# EAGLE board demeter_v25 (EAGLE 6.2)
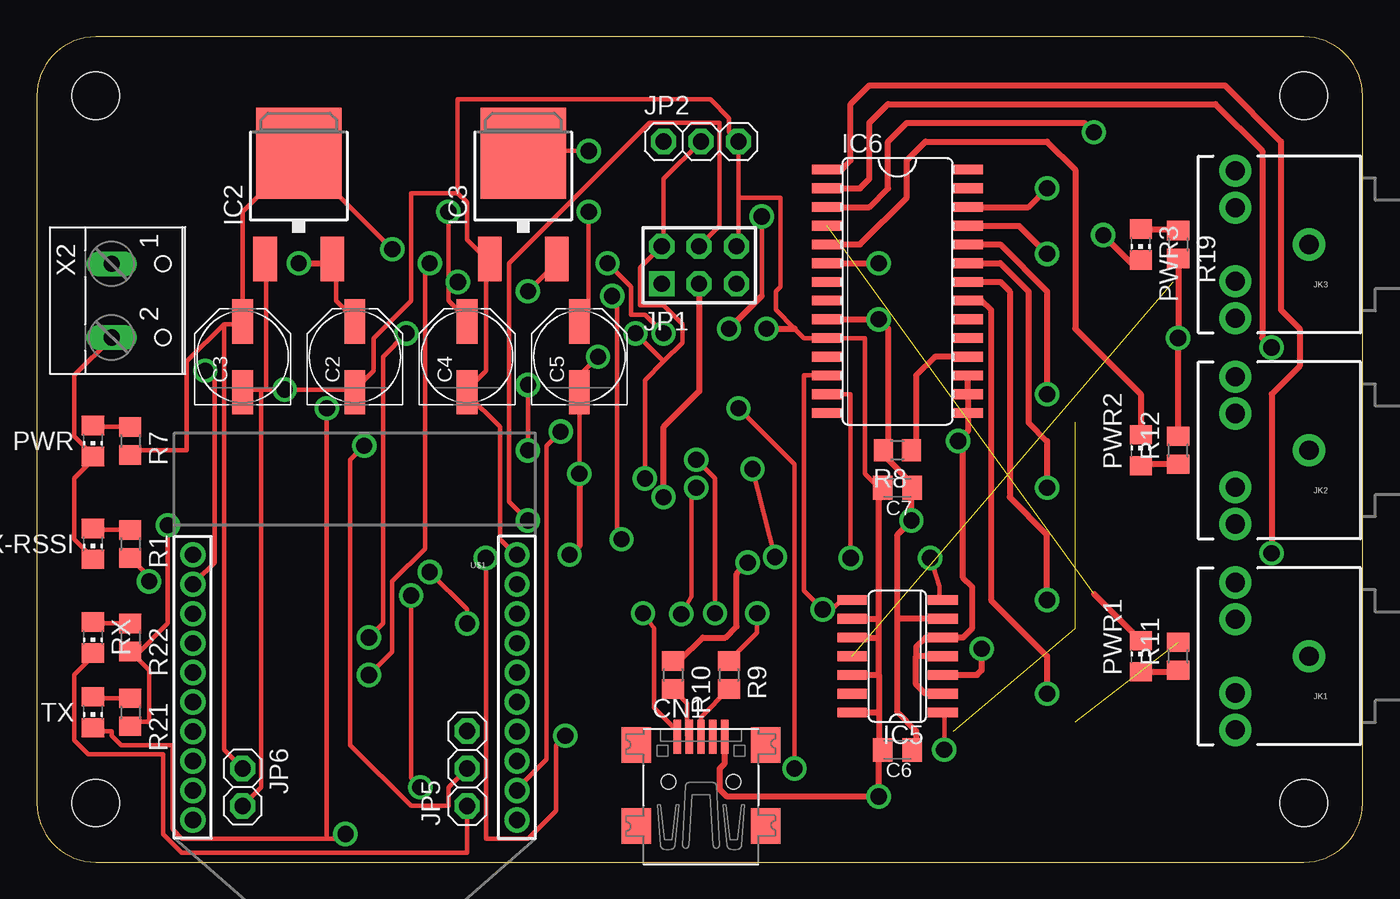
[diagram p0: board, top side]
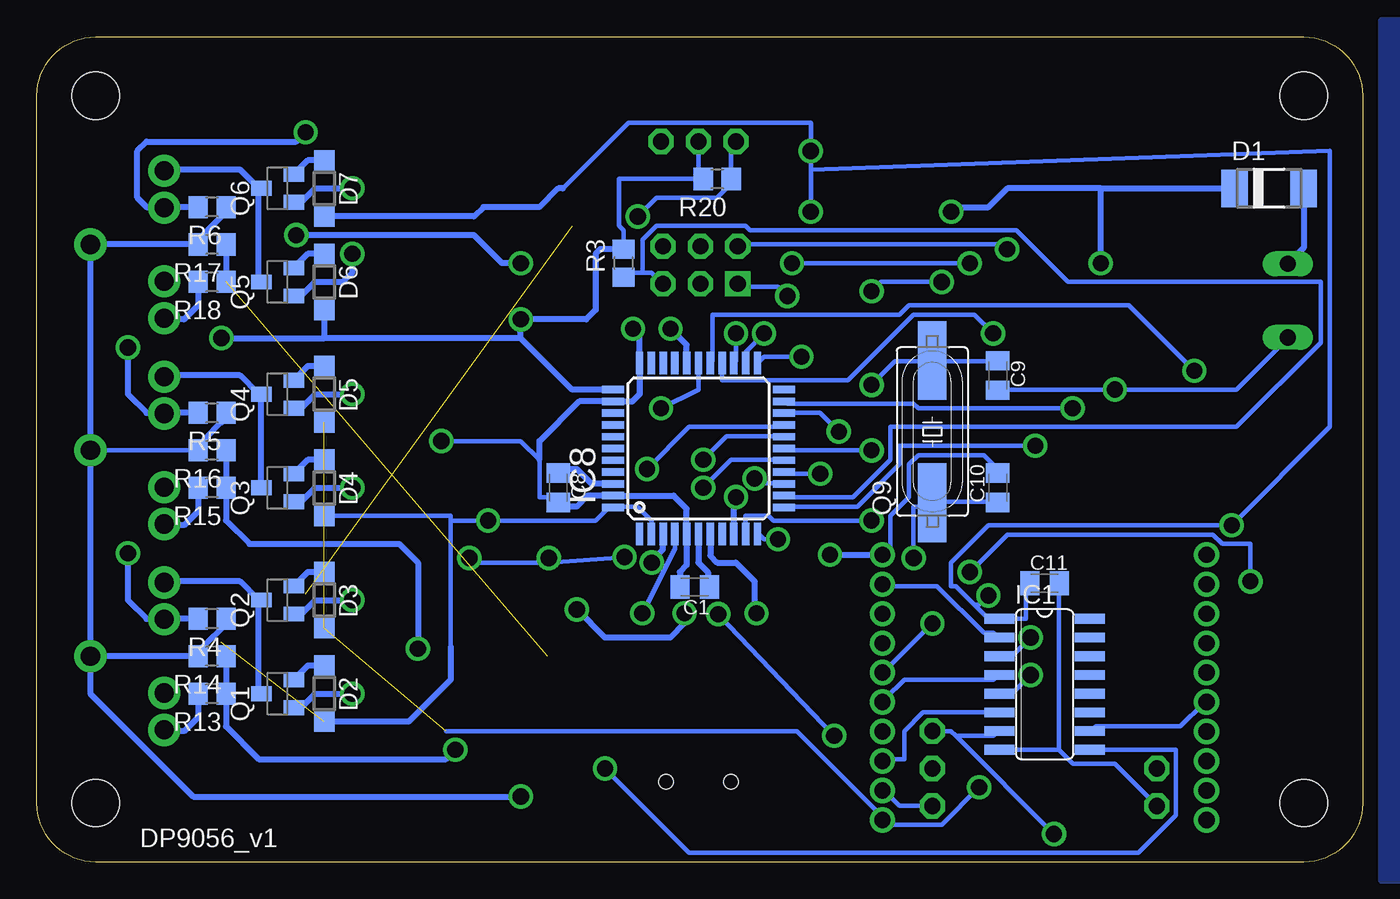
[diagram p1: board, bottom side, seen from below]

Size 90 x 56 mm. Coordinates in mm from the lower left corner, seen from the top.
Copper layers (1*16): Top 0.035mm / dielectric 1.5mm / Bottom 0.035mm
Design rules: minimum track width 12mil, minimum drill 1.1mm, track to track 8mil, track to pad 8mil, pad to pad 8mil, via to via 8mil, smd to smd 8mil, copper to edge 10mil, drill to drill 8mil, minimum pad ring 12mil, minimum via ring 10mil, stop-mask expansion 4mil, vias tented up to drill 25mil, thermal gap 10mil

## Footprints (pad centres in the part's own frame; a part is rotated, then mirrored left to right if it is on the bottom)
C0805K = smd 1.3 x 1.6: 1 -1,0; 2 1,0
PANASONIC_D = smd 3 x 1.4: + 2.4,0; - -2.4,0
USB-MINIB = smd 0.5 x 2.308: D+ 0,4.064; D- -0.8,4.064; GND 1.6,4.064; ID 0.8,4.064; VBUS -1.6,4.064 | smd 2 x 2.4: GND1 -4.4,-2; GND2 -4.4,3.5; GND3 4.4,3.5; GND4 4.4,-2 | hole 1: -2.2,1; 2.2,1
DO-214AC = smd 1.778 x 2.54: A 2.342,0; C -2.342,0
SOD123 = smd 1.4 x 1.4: A 1.9,0; C -1.9,0
SO16 = smd 0.66 x 2.032: 1 -4.445,-3.073; 2 -3.175,-3.073; 3 -1.905,-3.073; 4 -0.635,-3.073; 5 0.635,-3.073; 6 1.905,-3.073; 7 3.175,-3.073; 8 4.445,-3.073; 9 4.445,3.073; 10 3.175,3.073; 11 1.905,3.073; 12 0.635,3.073; 13 -0.635,3.073; 14 -1.905,3.073; 15 -3.175,3.073; 16 -4.445,3.073
DPACK = smd 1.6 x 3: 1 -2.28,-4.8; 3 2.28,-4.8 | smd 5.8 x 6.2: 4 0,2.38
SO14 = smd 2.032 x 0.66: 1 -3.073,3.81; 2 -3.073,2.54; 3 -3.073,1.27; 4 -3.073,0; 5 -3.073,-1.27; 6 -3.073,-2.54; 7 -3.073,-3.81; 8 3.073,-3.81; 9 3.073,-2.54; 10 3.073,-1.27; 11 3.073,0; 12 3.073,1.27; 13 3.073,2.54; 14 3.073,3.81
SO28W = smd 0.66 x 2.032: 1 -7.62,-4.78; 2 -6.35,-4.78; 3 -5.08,-4.78; 4 -3.81,-4.78; 5 -2.54,-4.78; 6 -1.27,-4.78; 7 0,-4.78; 8 1.27,-4.78; 9 2.54,-4.78; 10 3.81,-4.78; 11 5.08,-4.78; 12 6.35,-4.78; 13 7.62,-4.78; 14 8.89,-4.78; 15 8.89,4.78; 16 7.62,4.78; 17 6.35,4.78; 18 5.08,4.78; 19 3.81,4.78; 20 2.54,4.78; 21 1.27,4.78; 22 0,4.78; 23 -1.27,4.78; 24 -2.54,4.78; 25 -3.81,4.78; 26 -5.08,4.78; 27 -6.35,4.78; 28 -7.62,4.78
TQFP44 = smd 1.5 x 0.5: 1 -5.8,4; 2 -5.8,3.2; 3 -5.8,2.4; 4 -5.8,1.6; 5 -5.8,0.8; 6 -5.8,0; 7 -5.8,-0.8; 8 -5.8,-1.6; 9 -5.8,-2.4; 10 -5.8,-3.2; 11 -5.8,-4; 23 5.8,-4; 24 5.8,-3.2; 25 5.8,-2.4; 26 5.8,-1.6; 27 5.8,-0.8; 28 5.8,0; 29 5.8,0.8; 30 5.8,1.6; 31 5.8,2.4; 32 5.8,3.2; 33 5.8,4 | smd 0.5 x 1.5: 12 -4,-5.8; 13 -3.2,-5.8; 14 -2.4,-5.8; 15 -1.6,-5.8; 16 -0.8,-5.8; 17 0,-5.8; 18 0.8,-5.8; 19 1.6,-5.8; 20 2.4,-5.8; 21 3.2,-5.8; 22 4,-5.8; 34 4,5.8; 35 3.2,5.8; 36 2.4,5.8; 37 1.6,5.8; 38 0.8,5.8; 39 0,5.8; 40 -0.8,5.8; 41 -1.6,5.8; 42 -2.4,5.8; 43 -3.2,5.8; 44 -4,5.8
AUDIO-JACK = drill 1.3 pad 2.184: RING 5,5; RSH 5,2.5; SLEEVE 0,0; TIP 5,-5; TSH 5,-2.5
AVR-ISP-6 = drill 1.1 square: 1 -2.54,-1.27 | drill 1.1 octagon: 2 -2.54,1.27; 3 0,-1.27; 4 0,1.27; 5 2.54,-1.27; 6 2.54,1.27
1X03 = drill 1.1 octagon: 1 -2.54,0; 2 0,0; 3 2.54,0
1X02 = drill 1.1 octagon: 1 -1.27,0; 2 1.27,0
CHIP-LED0805 = smd 1.5 x 1.3: A 0,-1.05; C 0,1.05
SOT23 = smd 1 x 1.4: 1 -0.95,-1.1; 2 0.95,-1.1; 3 0,1.1
HC49UP = smd 5.334 x 1.93: 1 -4.826,0; 2 4.826,0
R0805 = smd 1.3 x 1.5: 1 -0.95,0; 2 0.95,0
XBEE-1 = drill 1.1: 1 -11,20; 2 -11,18; 3 -11,16; 4 -11,14; 5 -11,12; 6 -11,10; 7 -11,8; 8 -11,6; 9 -11,4; 10 -11,2; 11 11,2; 12 11,4; 13 11,6; 14 11,8; 15 11,10; 16 11,12; 17 11,14; 18 11,16; 19 11,18; 20 11,20
DP9056_V1 = hole 3.2: 4,4; 86,4; 86,52; 4,52
W237-102 = drill 1.1 long: 1 -2.5,-1.27; 2 2.5,-1.27

## Placement (x,y rotation side)
C1  1uF  [C0805K]  45.34,18.67 180 bottom
C2  22uF  [PANASONIC_D]  21.59,34.29 90 top
C3  100uF  [PANASONIC_D]  13.97,34.29 90 top
C4  22uF  [PANASONIC_D]  29.21,34.29 90 top
C5  100uF  [PANASONIC_D]  36.83,34.29 90 top
C6  100nF  [C0805K]  58.42,7.62 180 top
C7  100nF  [C0805K]  58.42,25.4 180 top
C8  100nF  [C0805K]  54.61,25.4 270 bottom
C9  22pF  [C0805K]  24.77,33.02 270 bottom
C10  22pF  [C0805K]  24.77,25.4 90 bottom
C11  100nF  [C0805K]  21.59,18.92 0 bottom
CN1  [USB-MINIB]  45.08,4.45 0 top
D1  S1M  [DO-214AC]  6.35,45.72 0 bottom
D2  [SOD123]  70.48,11.43 270 bottom
D3  [SOD123]  70.48,17.78 270 bottom
D4  [SOD123]  70.48,25.4 270 bottom
D5  [SOD123]  70.48,31.75 270 bottom
D6  [SOD123]  70.48,39.37 270 bottom
D7  [SOD123]  70.48,45.72 270 bottom
IC1  4050  [SO16]  21.59,12.07 270 bottom
IC2  LM1117-5.0  [DPACK]  17.78,45.72 0 top
IC3  LM1117-3.3  [DPACK]  33.02,45.72 0 top
IC5  MCP3424  [SO14]  58.42,13.97 180 top
IC6  MCP23017SO  [SO28W]  58.42,39.37 270 top
IC8  ATMEGA32U4-AU  [TQFP44]  45.08,28.07 90 bottom
JK1  [AUDIO-JACK]  86.36,13.97 180 top
JK2  [AUDIO-JACK]  86.36,27.94 180 top
JK3  [AUDIO-JACK]  86.36,41.91 180 top
JP1  AVR-ISP-6  [AVR-ISP-6]  44.96,40.51 0 top
JP2  [1X03]  45.08,48.89 0 top
JP5  [1X03]  29.21,6.35 90 top
JP6  [1X02]  13.97,5.08 270 top
PWR  [CHIP-LED0805]  3.81,28.57 180 top
PWR1  [CHIP-LED0805]  74.93,13.97 0 top
PWR2  [CHIP-LED0805]  74.93,27.94 0 top
PWR3  [CHIP-LED0805]  74.93,41.91 180 top
Q1  IRLML6402  [SOT23]  73.66,11.43 90 bottom
Q2  [SOT23]  73.66,17.78 90 bottom
Q3  IRLML6402  [SOT23]  73.66,25.4 90 bottom
Q4  [SOT23]  73.66,31.75 90 bottom
Q5  IRLML6402  [SOT23]  73.66,39.37 90 bottom
Q6  [SOT23]  73.66,45.72 90 bottom
Q9  [HC49UP]  29.21,29.21 90 bottom
R1  [R0805]  6.35,21.59 270 top
R3  [R0805]  50.16,40.64 90 bottom
R4  [R0805]  78.11,16.51 180 bottom
R5  [R0805]  78.11,30.48 180 bottom
R6  [R0805]  78.11,44.45 180 bottom
R7  [R0805]  6.35,28.57 270 top
R8  [R0805]  58.42,27.94 180 top
R9  22  [R0805]  46.99,12.7 270 top
R10  22  [R0805]  43.18,12.7 270 top
R11  [R0805]  77.47,13.97 90 top
R12  [R0805]  77.47,27.94 90 top
R13  [R0805]  78.11,11.43 180 bottom
R14  [R0805]  78.11,13.97 180 bottom
R15  [R0805]  78.11,25.4 180 bottom
R16  [R0805]  78.11,27.94 180 bottom
R17  [R0805]  78.11,41.91 180 bottom
R18  [R0805]  78.11,39.37 180 bottom
R19  [R0805]  77.47,41.91 270 top
R20  10k  [R0805]  43.81,46.35 180 bottom
R21  [R0805]  6.35,10.16 270 top
R22  [R0805]  6.35,15.24 270 top
RX  [CHIP-LED0805]  3.81,15.24 180 top
TX  [CHIP-LED0805]  3.81,10.16 180 top
U$1  XBEE-1B1  [XBEE-1]  21.59,22.86 180 top
U$6  [DP9056_V1]  0,0 0 top
X2  [W237-102]  6.35,38.1 270 top
X-RSSI  [CHIP-LED0805]  3.81,21.59 180 top

## Library data of the parts
C1-C11 CN1 D1-D7 IC1-IC3 IC8 JK1-JK3 JP1 JP2 JP5 JP6 PWR PWR1-PWR3 Q1-Q6 Q9 R1 R3-R22 RX TX U$1 U$6 X2 X-RSSI = mark_2
IC5 = mark_2; MPN: MCP3424-E/SL; OC_FARNELL: 1630424; OC_NEWARK: 54M4871; PACKAGE: SOIC-14; SUPPLIER: Microchip
IC6 = mark_2; MF: MICROCHIP; MPN: MCP23017-E/SO; OC_FARNELL: 1332087; OC_NEWARK: 31K2958

## Nets
+3V3: C5.+ C11.1 D3.A D5.A D7.A IC1.1 IC3.4 R21.2 R22.2 U$1.1
+5V: C3.+ C6.1 C7.1 D2.A D4.A D6.A IC2.4 IC5.6 IC6.9 IC8.2 IC8.14 IC8.24 IC8.34 IC8.44 JP1.2 JP2.2 JP6.1 R3.2 R7.2 R8.2 R11.2 R12.2 R19.2 R20.2
+12V: C2.+ C4.+ D1.C IC2.3 IC3.3
CH1: IC5.1 R13.1 R14.1
CH2: IC5.3 R15.1 R16.1
CH3: IC5.11 R17.1 R18.1
CTS: IC8.27 U$1.12
D+: IC8.4 R9.1
D-: IC8.3 R10.1
DATA: IC8.29 JP2.1 R20.1
DTR: IC1.3 IC8.26
EN: IC8.12 JP5.2
EN1-3: IC6.22 Q2.1
EN1-5: IC6.21 Q1.1
EN2-3: IC6.24 Q4.1
EN2-5: IC6.23 Q3.1
EN3-3: IC6.26 Q6.1
EN3-5: IC6.25 Q5.1
GND: C1.2 C2.- C3.- C4.- C5.- C6.2 C7.2 C8.2 C9.2 C10.2 C11.2 CN1.GND IC1.8 IC2.1 IC3.1 IC5.2 IC5.4 IC5.5 IC5.9 IC5.10 IC5.12 IC5.14 IC6.10 IC6.15 IC6.16 IC6.17 IC8.5 IC8.15 IC8.23 IC8.33 IC8.35 IC8.43 JK1.SLEEVE JK2.SLEEVE JK3.SLEEVE JP1.6 JP2.3 JP6.2 PWR.C R4.1 R5.1 R6.1 R14.2 R16.2 R17.2 U$1.10 X2.2 X-RSSI.C
MISO: IC8.11 JP1.1
MOSI: IC8.10 JP1.4
N$1: D1.A X2.1
N$2: PWR.A R7.1
N$3: IC1.6 U$1.3
N$4: IC1.4 U$1.5
N$5: PWR1.A R11.1
N$6: R1.1 X-RSSI.A
N$7: IC1.2 U$1.9
N$8: IC1.10 U$1.16
N$11: IC6.18 R8.1
N$12: JK1.TIP Q1.3 Q2.3
N$13: D2.C Q1.2
N$14: D3.C Q2.2
N$15: JK2.TIP Q3.3 Q4.3
N$16: D4.C Q3.2
N$17: D5.C Q4.2
N$18: JK3.TIP Q5.3 Q6.3
N$19: D6.C Q5.2
N$20: D7.C Q6.2
N$22: PWR2.A R12.1
N$23: PWR3.A R19.1
N$24: C1.1 IC8.6
N$25: C8.1 IC8.42
N$26: C9.1 IC8.17 Q9.2
N$27: C10.1 IC8.16 Q9.1
N$28: CN1.D+ R9.2
N$29: CN1.D- R10.2
N$30: JK1.RING R13.2
N$31: IC6.6 PWR3.C
N$32: JK2.RING R15.2
N$33: IC6.5 PWR2.C
N$34: JK3.RING R18.2
N$35: IC6.4 PWR1.C
N$36: R21.1 TX.A
N$37: R22.1 RX.A
RESET: IC1.5 IC8.25
RSSI: R1.2 U$1.6
RST: IC8.13 JP1.5 R3.1
RTS: IC1.9 IC8.28
RX: IC8.20 JP5.1 RX.C U$1.2
RXLED: IC8.8
SCK: IC8.9 JP1.3
SCL: IC5.8 IC6.12 IC8.18
SDA: IC5.7 IC6.13 IC8.19
SN1: IC6.1 JK1.TSH R4.2
SN2: IC6.2 JK2.TSH R5.2
SN3: IC6.3 JK3.TSH R6.2
TX: IC1.7 IC8.21 JP5.3 TX.C
TXLED: IC8.22
VBUS: CN1.VBUS IC8.7

## Tracks (layer width: path | path; a pad name or v marks a point on that pad's centre or on a via)
+3V3  (via drill 1.1)  (2 unrouted)
  Top 0.305: 6.67,13.97 R22.2 6.67,13.97 | 6.67,13.97 7.62,13.02 7.62,9.53 6.35,9.53 R21.2 | 6.67,13.97 8.89,16.19 v8.89,22.86 | v37.46,44.13 37.46,37.46 36.83,36.83 C5.+ | v37.46,48.26 33.02,48.26 IC3.4 | v26.04,5.08 25.4,5.71 v25.4,18.1
  Bottom 0.305: 62.23,8.89 38.42,8.89 32.7,3.18 U$1.1 32.38,2.86 32.07,2.54 28.57,2.54 v26.04,5.08 | C11.1 22.86,18.73 22.86,16.51 IC1.1 25.4,16.51 26.35,17.46 | 26.35,17.46 27.62,18.73 27.94,18.73 27.94,20.32 25.4,22.86 v8.89,22.86 2.22,29.53 2.22,48.26 37.46,46.99 | 37.46,46.99 v37.46,48.26 37.46,50.16 49.85,50.16 54.29,45.72 | 37.46,46.99 v37.46,44.13 | v25.4,18.1 26.04,17.46 26.35,17.46
  Bottom 0.406: 54.29,45.72 54.61,45.72 55.88,44.45 59.69,44.45 60.32,43.81 D7.A
+5V  (via drill 1.1)  (1 unrouted)
  Top 0.305: 12.7,36.51 10.16,33.97 10.16,27.94 6.35,27.94 R7.2 | 12.7,36.51 13.97,36.51 C3.+ 13.97,44.13 17.78,47.94 | JP6.1 12.7,7.62 12.7,36.51 | v41.27,26.04 41.27,32.7 42.54,33.97 | 42.54,33.97 43.81,35.24 43.81,36.51 42.54,37.78 40.96,37.78 40.96,40.32 JP1.2 42.54,41.91 42.54,46.35 JP2.2 | 42.54,33.97 v40.64,35.88 | 59.37,25.72 59.37,25.4 C7.1 | 57.78,27.94 R8.2 | 59.37,7.62 C6.1 | v24.13,41.59 17.78,47.94 | 17.78,47.94 IC2.4
  Top 0.406: R19.2 v77.47,35.56 R12.2 | C6.1 59.69,7.89 59.69,8.89 58.42,10.16 58.42,16.51 | IC5.6 58.42,16.51 | 58.42,16.51 58.42,22.23 v59.37,23.18 59.37,25.35 C7.1 | 59.37,25.72 57.66,27.43 57.66,27.75 R8.2 57.78,28.25 57.78,36.2 v57.15,36.83 IC6.9
  Bottom 0.305: R3.2 50.16,42.86 50.48,43.18 50.48,46.35 45.08,46.35 | 45.08,46.35 R20.2 | 45.08,46.35 JP2.2 | v41.27,26.04 40.96,25.72 39.37,25.72 IC8.14 | v40.64,35.88 41.91,34.61 41.91,33.97 IC8.24 | IC8.2 48.26,22.54 48.26,23.18 49.21,24.13 50.8,24.13 IC8.44 51.12,24.13 52.07,23.18 v59.37,23.18 61.91,23.18 | 61.91,23.18 61.91,23.5 69.22,23.5 D4.A | 61.91,23.18 61.91,14.61 | v24.13,41.59 24.45,41.91 42.23,41.91 JP1.2
  Bottom 0.406: D6.A 70.48,35.56 | 61.91,14.61 61.91,12.38 64.77,9.53 69.84,9.53 D2.A | 57.15,35.56 70.48,35.56 | v77.47,35.56 70.48,35.56 | 57.15,35.56 v57.15,36.83 52.7,36.83 52.07,37.46 52.07,41.27 51.75,41.59 R3.2 | IC8.34 53.66,32.07 57.15,35.56
+12V  (via drill 1.1)
  Top 0.305: 20,40.96 IC2.3 20.32,40.64 20.32,38.1 21.59,36.83 C2.+ | v27.94,44.13 27.94,39.37 | 27.94,39.37 27.94,38.1 29.21,36.83 C4.+ | v33.34,38.73 35.24,40.64 IC3.3 | 27.94,39.37 v28.57,39.37
  Top 0.406: v17.78,40.64 19.78,40.64 IC2.3
  Bottom 0.305: v33.34,38.73 32.7,39.37 v28.57,39.37
  Bottom 0.406: v17.78,40.64 17.78,45.72 | 17.78,45.72 D1.C | v27.94,44.13 27.94,44.45 25.4,44.45 24.13,45.72 17.78,45.72
CH1  (via drill 1.1)
  Top 0.305: v61.59,7.62 61.59,10.16 IC5.1
  Bottom 0.305: R14.1 | R13.1
  Bottom 0.406: R14.1 R13.1 | R13.1 77.15,9.21 74.93,6.99 62.23,6.99 v61.59,7.62
CH2  (via drill 1.1)
  Top 0.406: v64.14,14.48 64.14,13.02 63.82,12.7 IC5.3
  Bottom 0.305: R16.1 | R15.1
  Bottom 0.406: v64.14,14.48 64.14,20.32 65.41,21.59 75.56,21.59 77.16,23.18 R15.1 R16.1
CH3  (1 unrouted)
  Bottom 0.406: R17.1 R18.1
CTS  (via drill 1.1)
  Top 0.305: v11.43,33.34 12.07,32.7 12.07,20.32 10.79,19.05 U$1.12
  Bottom 0.305: v11.43,33.34 15.88,37.78 30.8,37.78 31.43,37.15 44.13,37.15 44.13,33.97 IC8.27
D+  (via drill 1.1)
  Top 0.305: v48.89,16.89 48.89,15.56 R9.1
  Bottom 0.305: v48.89,16.89 46.67,21.27 46.67,22.23 IC8.4
D-  (via drill 1.1)
  Top 0.406: R10.1 43.62,13.65 45.21,15.24 46.74,15.24 47.5,16 47.5,19.56 v48.26,20.32
  Bottom 0.406: v48.26,20.32 48.26,20.45 47.5,21.21 47.5,22.25 IC8.3
DATA  (via drill 1.1)
  Top 0.305: v49.21,43.81 49.21,38.42
  Top 0.406: v46.99,36.2 49.21,38.42
  Bottom 0.305: JP2.1 42.86,48.89 R20.1 43.18,46.35 43.18,45.72 43.81,45.08 47.94,45.08 v49.21,43.81
  Bottom 0.406: IC8.29 45.88,35.09 v46.99,36.2
DTR  (via drill 1.1)
  Top 0.305: v25.08,35.88 23.5,34.29 23.5,16.19 v22.54,15.24
  Bottom 0.305: v25.08,35.88 26.35,37.15 30.48,37.15 34.92,32.7 43.5,32.7 43.5,33.65 IC8.26 | v22.54,15.24 23.81,13.97 IC1.3
EN  (via drill 1.1)
  Top 0.305: v22.23,28.26 21.27,27.3 21.27,7.94 25.4,3.81 27.94,3.81 27.94,5.08 JP5.2
  Bottom 0.305: v22.23,28.26 31.43,28.26 31.43,26.99 34.29,24.13 39.05,24.13 IC8.12
EN1-3  (via drill 1.1)
  Top 0.406: v68.58,17.78 68.58,22.23 66.04,24.77 66.04,38.73 65.41,39.37 IC6.22
  Bottom 0.406: Q2.1 72.07,16.83 71.12,17.78 v68.58,17.78
EN1-5  (via drill 1.1)
  Top 0.406: IC6.21 64.14,38.1 64.77,37.46 64.77,17.78 68.58,13.97 v68.58,11.43
  Bottom 0.406: Q1.1 72.07,10.48 71.12,11.43 v68.58,11.43
EN2-3  (via drill 1.1)
  Top 0.406: v68.58,31.75 68.58,38.73 65.41,41.91 IC6.24
  Bottom 0.406: Q4.1 72.07,30.8 71.12,31.75 v68.58,31.75
EN2-5  (via drill 1.1)
  Top 0.406: IC6.23 65.41,40.64 67.31,38.73 67.31,29.84 68.58,28.57 v68.58,25.4
  Bottom 0.406: v68.58,25.4 71.12,25.4 72.07,24.45 Q3.1
EN3-3  (via drill 1.1)
  Top 0.406: IC6.26 67.31,44.45 v68.58,45.72
  Bottom 0.406: Q6.1 72.07,44.77 71.12,45.72 v68.58,45.72
EN3-5  (via drill 1.1)
  Top 0.305: IC6.25 62.55,43.18
  Top 0.406: 62.55,43.18 66.67,43.18 v68.58,41.27
  Bottom 0.406: Q5.1 72.07,38.42 71.12,39.37 69.22,39.37 68.58,40 v68.58,41.27
GND  (via drill 1.1)
  Top 0.305: 63.18,33.02 IC6.17 | 63.18,31.75 IC6.16 | 61.28,15.24 IC5.5 | 61.28,13.97 IC5.4 61.59,13.97 | 63.18,30.48 IC6.15 | 47.62,45.08 JP2.3 46.99,49.53 46.99,50.48 45.72,51.75 28.57,51.75 28.57,45.4 | 47.62,45.08 47.62,41.91 JP1.6 | v36.83,26.35 36.83,26.99 C5.- 36.83,33.02 v38.1,34.29 | 57.15,7.62 C6.2 57.47,7.62 | 55.56,15.24 IC5.10 | 55.56,16.51 IC5.9 55.24,16.51 | C7.2 57.15,25.4 56.2,26.35 56.2,35.56 IC6.10 52.07,35.56 51.43,36.2 50.16,37.46 50.16,38.73 50.48,39.05 50.48,45.08 47.62,45.08 | 55.56,10.16 IC5.14 | 46.67,8.26 CN1.GND | X-RSSI.C 3.81,20.64 2.54,21.91 2.54,26.04 3.81,27.3 PWR.C 3.81,27.62 2.54,28.89 2.54,33.02 5.08,35.56 X2.2 | U$1.10 32.38,20.96 31.43,21.91 31.43,29.53 29.21,31.75 C4.- 29.21,32.07 30.48,33.34 30.48,40.64 IC3.1 30.48,40.96 29.21,42.23 29.21,44.77 28.57,45.4 | 21.59,32.07 v16.83,32.07 15.56,32.07 | 15.56,32.07 15.24,32.07 | 15.24,32.07 13.97,32.07 C3.- | 15.56,32.07 15.56,40.64 IC2.1 | 15.24,32.07 15.24,5.08 JP6.2 | 28.57,45.4 25.4,45.4 25.4,38.1 22.86,35.56 22.86,33.34 21.59,32.07 | 21.59,32.07 C2.-
  Top 0.406: 55.56,10.16 57.15,10.16 | 57.15,12.7 57.15,15.24 | 57.15,15.24 57.15,16.51 | C7.2 57.15,25.13 57.15,25.15 57.4,24.89 57.15,24.64 57.15,16.51 | IC5.12 57.15,12.7 | IC5.9 57.15,16.51 | IC5.10 57.15,15.24 | 46.67,8.26 46.67,6.67 46.35,6.35 46.35,4.95 46.86,4.45 v57.15,4.45 57.15,7.35 C6.2 57.15,7.89 57.15,10.16 | 36.83,26.99 36.83,21.46 36.2,20.83 v36.16,20.86 | IC5.2 60.32,11.43 59.69,12.07 59.69,13.97 | IC5.4 59.69,13.97 | v49.53,36.2 51.43,36.2 | 63.18,33.02 63.18,31.77 IC6.16 IC6.15 63.2,29.23 v62.55,28.57 62.87,28.26 62.87,19.3 63.5,18.67 63.5,15.88 62.87,15.24 IC5.5 60.32,15.24 59.69,14.61 59.69,13.97 | 57.15,12.7 57.15,10.16
  Bottom 0.305: C1.2 46.04,19.05 | 54.29,24.77 54.61,24.45 C8.2 54.29,24.77 | 54.29,24.77 55.88,24.77 55.88,27.3 57.15,28.57 v62.55,28.57 | JK2.SLEEVE R16.2 | 77.47,30.48 R5.1 | v36.83,26.35 39.05,26.35 IC8.15 | v38.1,34.29 40.64,34.29 40.96,33.97 IC8.23 | C9.2 24.77,32.07 v16.83,32.07 8.57,32.07 5.08,35.56 X2.2 | C10.2 24.77,26.67 25.72,27.62 30.16,27.62 30.8,26.99 30.8,24.77 32.07,23.5 32.07,20.96 32.38,20.96 U$1.10 | 20.64,7.62 20.64,18.73 C11.2 | IC1.8 20.64,7.62 | JP6.2 16.83,6.67 19.68,6.67 20.64,7.62
  Bottom 0.406: JK1.SLEEVE JK2.SLEEVE JK3.SLEEVE R17.2 78.74,42.22 78.74,42.54 77.16,44.13 R6.1 | v36.16,20.86 U$1.10 | 77.47,30.48 77.47,29.84 78.61,28.7 78.61,28.38 R16.2 | JK1.SLEEVE R14.2 78.74,14.29 78.74,14.61 77.16,16.19 R4.1 | v49.53,36.2 49.08,35.75 IC8.33 49.08,31.75 49.57,31.27 IC8.35 53.19,31.27 55.88,28.57 55.88,27.3 | C8.2 54.34,24.13 53.34,24.13 52.6,24.87 IC8.43 46.77,24.87 45.88,23.98 IC8.5 45.88,20.16 46.35,19.68 46.35,18.68 C1.2 | JK1.SLEEVE 86.36,11.43 79.38,4.45 v57.15,4.45
  pour Bottom (isolate 0.813): -1.27,57.15 -10.16,57.15 -10.16,-1.27 -1.27,-1.27
MISO  (via drill 1.1)
  Top 0.305: v39.69,21.91 39.37,22.23 39.37,38.1 v39.05,38.42
  Bottom 0.305: v39.69,21.91 40.64,21.91 40.96,22.23 IC8.11 | v39.05,38.42 39.69,39.05 42.23,39.05 JP1.1
MOSI  (via drill 1.1)
  Top 0.305: v33.34,23.18 32.07,24.45 32.07,40.64 41.59,50.16 46.35,50.16 46.35,43.18 JP1.4
  Bottom 0.305: v33.34,23.18 40,23.18 40.32,23.5 41.91,23.5 41.91,22.54 IC8.10
N$1
  Bottom 0.406: D1.A 4.01,41.67 X2.1
N$2
  Top 0.305: PWR.A 3.81,29.53 R7.1
N$3
  Bottom 0.305: IC1.6 29.84,10.16 31.11,8.89 31.11,6.99 32.38,6.99 U$1.3
N$4
  Bottom 0.305: IC1.4 24.77,12.7 25.08,12.38 31.11,12.38 32.38,11.11 U$1.5
N$5
  Top 0.406: PWR1.A 77.37,12.92 R11.1
N$6
  Top 0.305: X-RSSI.A 3.81,22.54 R1.1
N$7
  Bottom 0.305: IC1.2 24.77,15.24 25.08,15.56 25.72,15.56 28.89,18.73 32.38,18.73 U$1.9
N$8
  Bottom 0.305: IC1.10 18.41,8.89 18.1,9.21 12.38,9.21 10.79,10.79 U$1.16
N$11
  Top 0.305: IC6.18 62.55,34.29 | R8.1
  Top 0.406: 62.55,34.29 60.96,34.29 59.69,33.02 59.69,28.26 R8.1
N$12
  Bottom 0.305: 74.93,11.43 Q1.3 | 74.93,17.78 Q2.3
  Bottom 0.406: 74.93,11.43 74.93,17.61 Q2.3 | 74.93,17.78 76.2,19.05 81.28,19.05 JK1.TIP
N$13
  Bottom 0.305: 72.39,12.38 Q1.2
  Bottom 0.406: D2.C 71.61,13.33 Q1.2
N$14
  Bottom 0.406: D3.C 71.61,19.68 Q2.2
N$15
  Bottom 0.305: 74.3,31.75 Q4.3
  Bottom 0.406: Q3.3 Q4.3 74.93,31.75 76.2,33.02 81.28,33.02 JK2.TIP
N$16
  Bottom 0.406: D4.C 71.61,27.3 Q3.2
N$17
  Bottom 0.406: D5.C 71.61,33.65 Q4.2
N$18
  Bottom 0.305: 74.93,39.37 Q5.3 | 74.93,45.72 Q6.3
  Bottom 0.406: 74.93,39.37 74.93,45.55 Q6.3 | 74.93,45.72 76.2,46.99 81.28,46.99 JK3.TIP
N$19
  Bottom 0.305: 72.39,40.32 Q5.2
  Bottom 0.406: D6.C 71.61,41.27 Q5.2
N$20
  Bottom 0.406: D7.C 71.61,47.62 Q6.2
N$22
  Top 0.406: R12.1 75.03,26.99 PWR2.A
N$23
  Top 0.406: PWR3.A 77.37,42.96 R19.1
N$24
  Bottom 0.406: IC8.6 45.08,20.32 44.45,19.68 44.45,18.78 C1.1
N$25
  Bottom 0.305: 54.61,26.35 C8.1
  Bottom 0.406: IC8.42 52.34,25.67 53.34,26.67 54.34,26.67 C8.1
N$26  (via drill 1.1)
  Top 0.305: v33.34,32.38 v33.34,27.94
  Bottom 0.305: v33.34,27.94 39.05,27.94 IC8.17 | v33.34,32.38 31.75,33.97 29.21,33.97 | 29.21,33.97 24.77,33.97 C9.1 | 29.21,33.97 Q9.2
N$27  (via drill 1.1)
  Top 0.305: v44.77,25.4 44.45,25.08 44.45,18.03 v43.75,16.83 | v35.88,8.57 35.24,7.94 35.24,3.49 33.34,1.59 30.48,1.59 v30.48,20.64
  Bottom 0.305: v44.77,25.4 42.86,27.3 39.37,27.3 IC8.16 | v35.88,8.57 v43.75,16.83 | v30.48,20.64 30.48,24.13 29.21,24.13 Q9.1 29.21,24.45 24.77,24.45 C10.1
N$28
  Top 0.305: CN1.D+ 45.08,9.84 R9.2
N$29
  Top 0.305: R10.2 44.13,10.79 44.13,8.57 CN1.D-
N$30
  Bottom 0.406: R13.2 79.06,9.85 80.01,8.89 81.28,8.89 JK1.RING
N$31  (via drill 1.1)
  Top 0.305: 53.66,40.64 IC6.6
  Top 0.406: 53.66,40.64 v57.15,40.64 | v72.39,42.54 74.3,40.64 74.71,40.64 PWR3.C
  Bottom 0.406: v57.15,40.64 58.42,40.64 60.32,42.54 v72.39,42.54
N$32
  Bottom 0.406: R15.2 79.06,23.82 80.01,22.86 81.28,22.86 JK2.RING
N$33
  Top 0.406: IC6.5 55.88,41.91 59.05,45.08 59.05,47.62 60.32,48.89 68.58,48.89 70.48,46.99 70.48,36.2 74.93,31.75 PWR2.C
N$34
  Bottom 0.305: R18.2
  Bottom 0.406: R18.2 79.06,37.78 80.01,36.83 81.28,36.83 JK3.RING
N$35  (1 unrouted)
  Top 0.406: 71.76,18.2 PWR1.C
N$36
  Top 0.305: TX.A 3.81,11.11 R21.1
N$37
  Top 0.305: RX.A 3.81,16.19 R22.1
RESET  (via drill 1.1)
  Top 0.305: v42.54,35.88 41.27,37.15 40.32,37.15 40.32,39.05 v38.73,40.64 | v26.67,40.64 26.35,40.32 26.35,21.27 24.13,19.05 24.13,14.29 v22.54,12.7
  Bottom 0.305: v42.54,35.88 42.54,33.97 IC8.25 | v26.67,40.64 v38.73,40.64 | v22.54,12.7 23.81,11.43 IC1.5
RSSI  (via drill 1.1)
  Top 0.305: v7.62,19.05 7.62,19.37 R1.2 | v26.67,19.68 29.21,17.14 v29.21,16.19
  Bottom 0.305: v7.62,19.05 7.62,21.59 9.53,21.59 10.16,22.23 24.13,22.23 v26.67,19.68 | v29.21,16.19 32.38,13.02 U$1.6
RST
  Bottom 0.305: 48.89,40 48.89,42.23 47.94,43.18 41.91,43.18 41.59,42.86 23.5,42.86 20,39.37 2.86,39.37 2.86,35.24 8.57,29.53 32.07,29.53 32.07,27.3 34.61,24.77 39.05,24.77 IC8.13 | 48.89,40 50.16,40 R3.1 | JP1.5 48.26,40 48.89,40
RTS  (via drill 1.1)
  Top 0.305: v47.62,30.8 51.43,26.99 v51.43,6.35
  Bottom 0.305: IC8.28 45.08,32.07 v47.62,30.8 | v51.43,6.35 45.72,0.64 15.24,0.64 12.7,3.18 12.7,7.62 IC1.9
RX  (via drill 1.1)
  Top 0.305: v35.56,29.21 34.61,28.26 34.61,6.99 32.7,5.08 U$1.2 | JP5.1 29.21,0.64 9.84,0.64 8.57,1.9 8.57,7.3 3.49,7.3 2.54,8.26 2.54,12.7 3.81,13.97 RX.C
  Bottom 0.305: v35.56,29.21 36.83,30.48 39.05,30.48 IC8.20 | JP5.1 31.43,3.81 32.38,4.76 U$1.2
SCK  (via drill 1.1)
  Top 0.406: v42.54,24.77 42.54,29.53 44.96,31.94 JP1.3
  Bottom 0.406: IC8.9 42.68,24.27 v42.54,24.77
SCL  (via drill 1.1)
  Top 0.305: v44.77,27.3 46.04,26.04 v46.04,16.89 | IC5.8 54.61,17.78 53.97,17.14 v53.34,17.14 52.07,18.41 52.07,33.02 IC6.12
  Bottom 0.305: v44.77,27.3 43.18,28.89 39.37,28.89 IC8.18
  Bottom 0.406: v46.04,16.89 46.04,16.19 46.99,15.24 51.43,15.24 v53.34,17.14
SDA  (via drill 1.1)
  Top 0.305: v50.1,20.7 v48.58,26.67 | v60.64,20.64 61.28,18.73 61.28,17.78 IC5.7 | IC6.13 55.24,31.75 v55.24,20.64
  Bottom 0.305: v48.58,26.67 45.72,29.53 39.37,29.53 IC8.19 | 55.24,20.32 60.32,20.32 v60.64,20.64 | 55.24,20.32 v50.1,20.7 | 55.24,20.32 v55.24,20.64
SN1  (via drill 1.1)
  Top 0.406: IC6.1 54.61,46.99 55.24,47.62 55.24,51.43 56.51,52.7 80.65,52.7 84.45,48.89 84.45,37.46 85.73,36.2 85.73,33.65 83.82,31.75 v83.82,20.96
  Bottom 0.406: R4.2 81.32,16.51 JK1.TSH 81.4,16.51 82.55,16.51 83.82,17.78 v83.82,20.96
SN2  (via drill 1.1)
  Top 0.406: IC6.2 55.88,45.72 56.51,46.35 56.51,50.16 57.78,51.43 80.01,51.43 83.19,48.26 83.19,35.56 v83.82,34.92
  Bottom 0.406: R5.2 81.32,30.48 JK2.TSH 81.4,30.48 82.55,30.48 83.82,31.75 v83.82,34.92
SN3  (via drill 1.1)
  Top 0.406: IC6.3 56.51,44.45 57.78,45.72 57.78,48.89 59.05,50.16 71.12,50.16 v71.76,49.53
  Bottom 0.406: R6.2 81.32,44.45 JK3.TSH 81.4,44.45 82.55,44.45 83.19,45.08 83.19,48.26 82.55,48.89 72.39,48.89 v71.76,49.53
TX  (via drill 1.1)
  Top 0.305: 19.68,1.59 20.96,1.59 v20.96,1.9 | 19.68,1.59 9.84,1.59 9.21,2.22 9.21,7.94 5.71,7.94 5.08,8.57 5.08,8.89 3.81,8.89 TX.C | 19.68,1.59 v19.68,30.8
  Bottom 0.305: 27.62,8.57 27.94,8.89 JP5.3 | 27.62,8.57 v20.96,1.9 | v19.68,30.8 30.16,30.8 30.48,31.11 39.05,31.11 IC8.21 | 27.62,8.57 25.08,8.57 24.77,8.89 IC1.7
VBUS  (via drill 1.1)
  Top 0.305: v41.15,16.89 41.91,15.88 41.91,10.48 43.5,8.89 43.5,8.57 CN1.VBUS
  Bottom 0.406: IC8.7 44.28,20.79 43.81,20.32 42.54,20.32 41.27,19.05 41.27,17.02 v41.15,16.89